# Altium PCB DC_DC_PCB.PcbDoc
Units mm, origin at the board's own origin, x right, y up, seen from the top; angles counter-clockwise.
Board outline 59.94 x 78.23 mm, 2 copper layers (Top Layer, Bottom Layer); 46 components, 38 nets, 161 pads, 38 vias.
Unrouted connection lines stored in the file: 15.
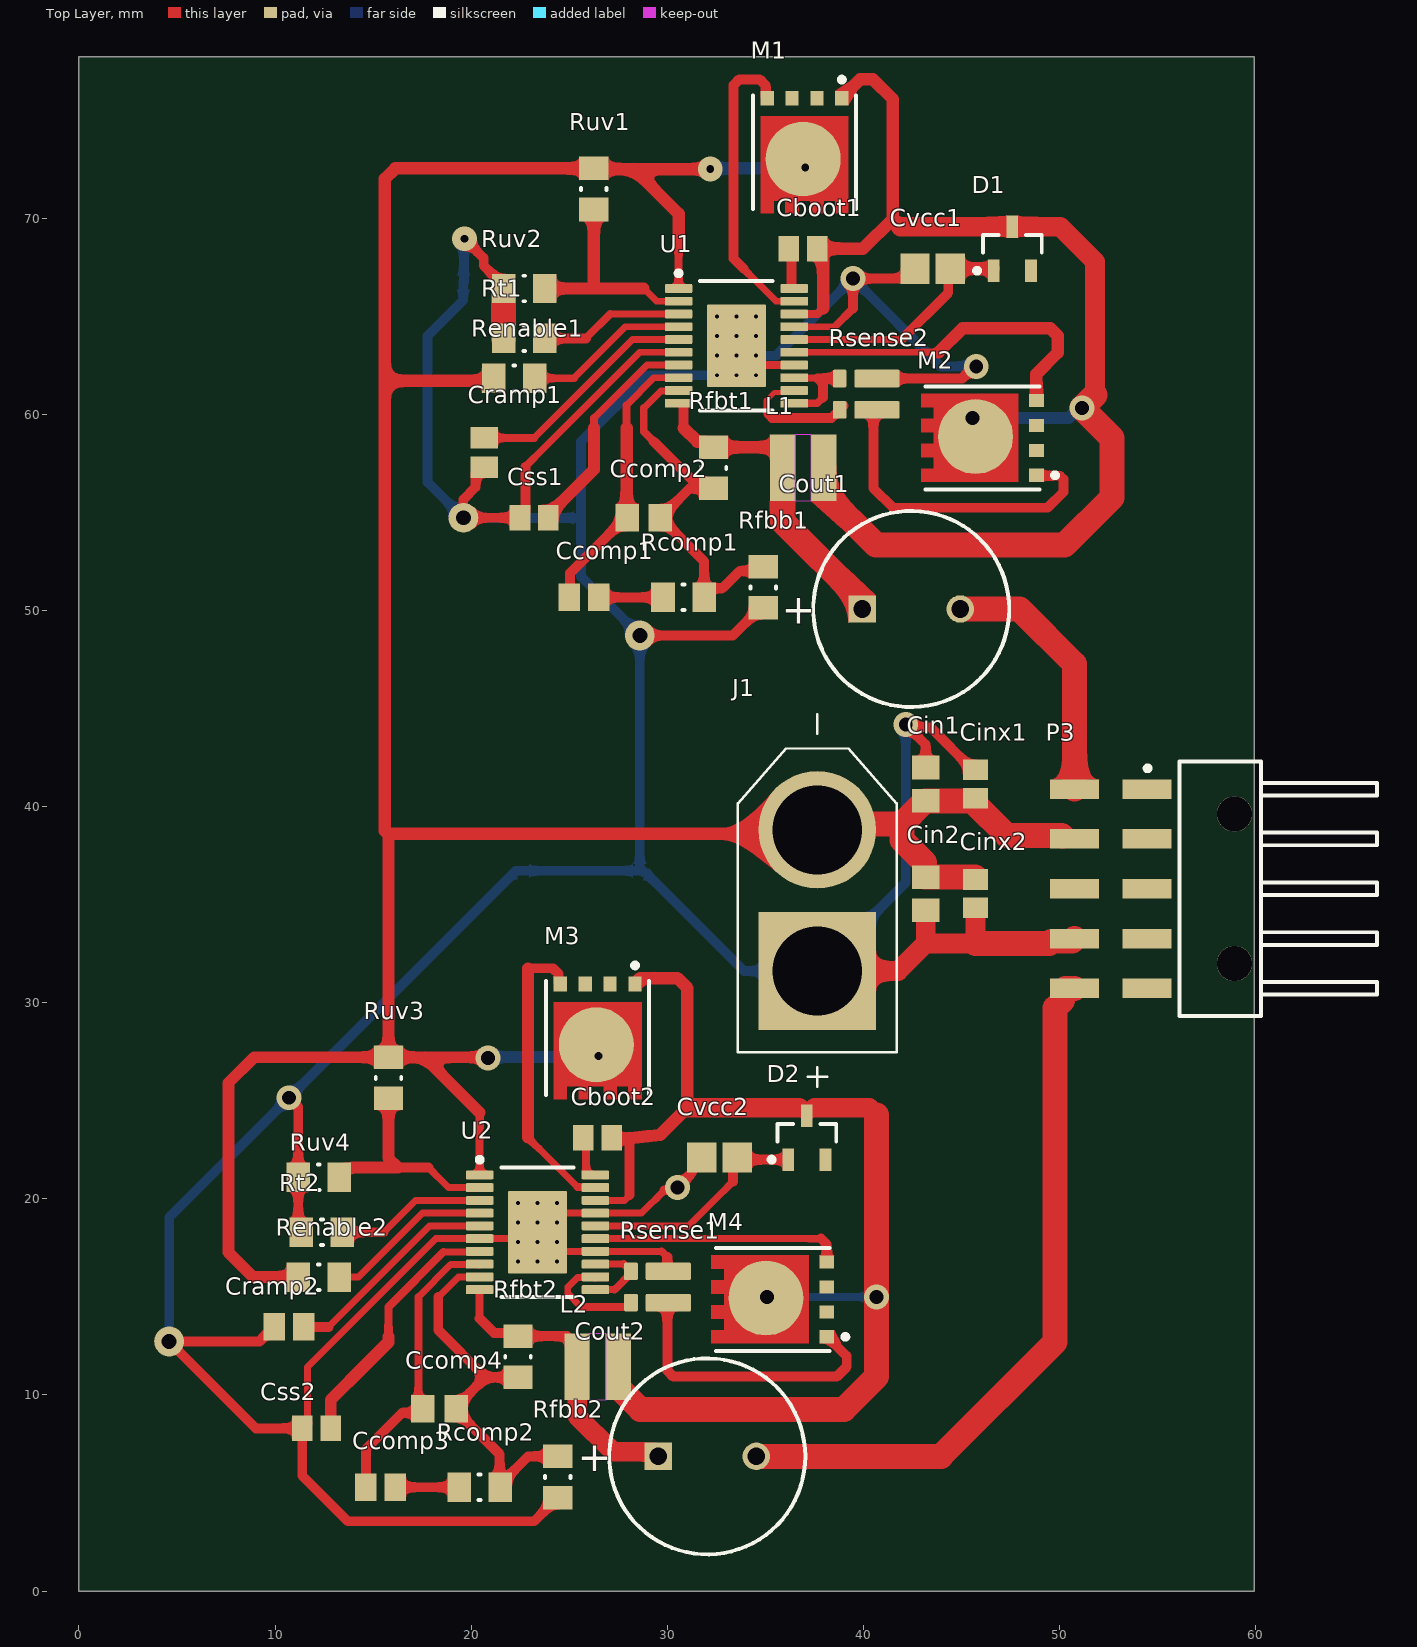
[diagram p0: Top Layer view]
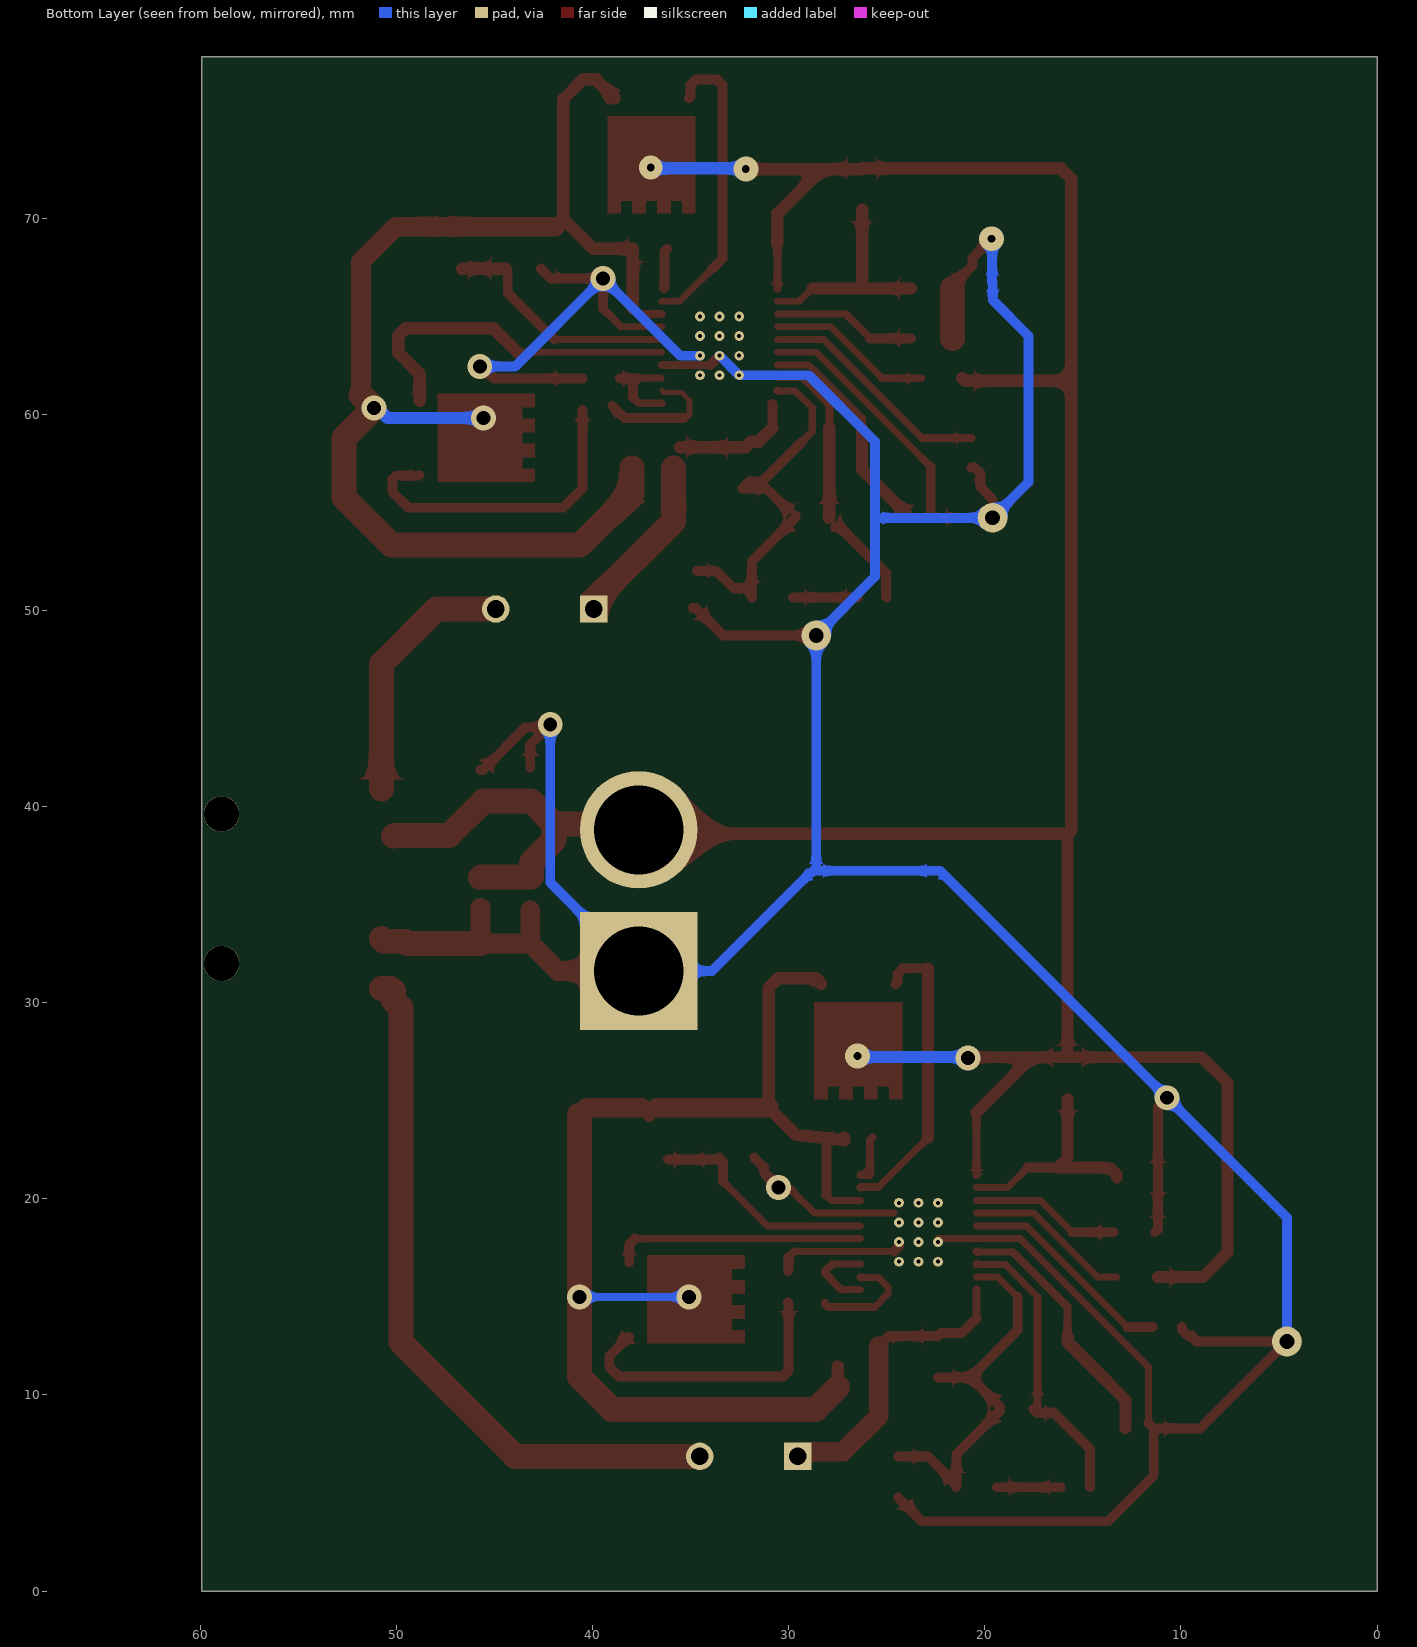
[diagram p1: Bottom Layer view, seen from below]
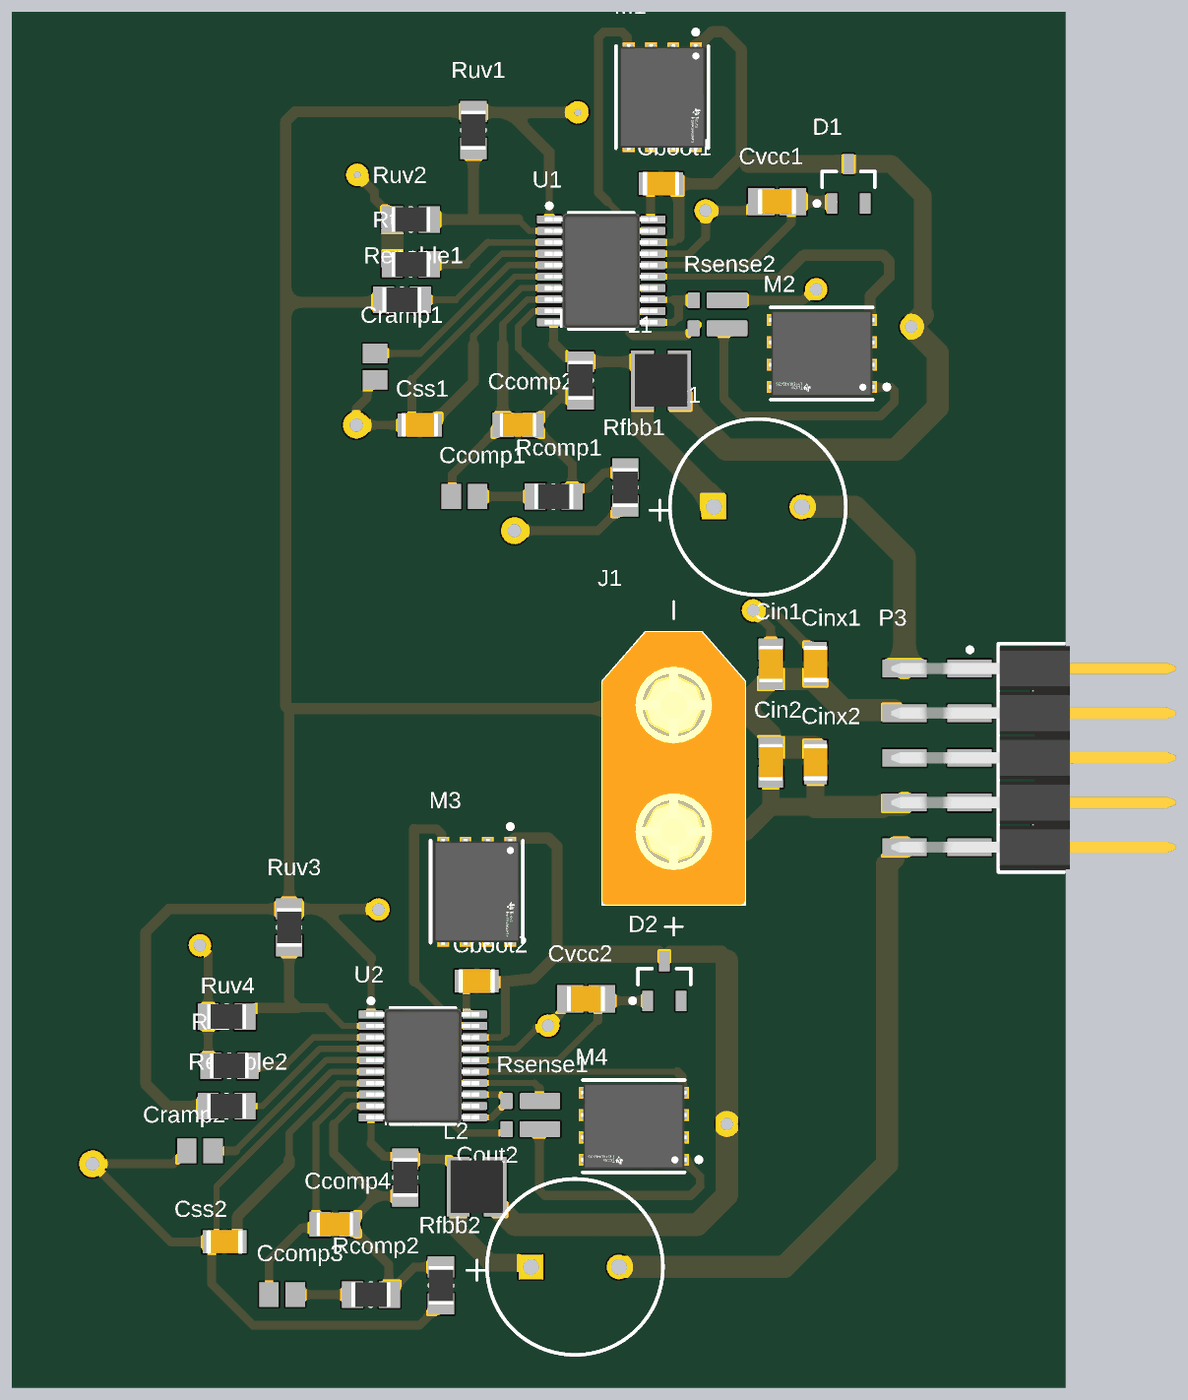
[diagram p2: 3D render of the assembled board from above, using the file's embedded part models]

## Layer stack, top to bottom
Top Solder: solder mask 0.0102, Solder Resist, Dk 3.5
Top Layer: signal copper 0.0356
Dielectric 1: dielectric 0.32, FR-4, Dk 4.8
Bottom Layer: signal copper 0.0356
Bottom Solder: solder mask 0.0102, Solder Resist, Dk 3.5

## Board outline
0,0 59.944,0 59.944,78.232 0,78.232

## Design rules (kind name [scope] priority, off if disabled: settings)
AssemblyTestPointUsage [All] p1: isadvanced=TRUE
AssemblyTestpoint [All] p1: isadvanced=TRUE testpointundercomponent=TRUE minsize=1.016 maxsize=2.54 preferedsize=1.524 minholesize=0 maxholesize=1.016 preferedholesize=0.813 testpointgrid=0.025 usegrid=TRUE gridtolerance=0 allowsidetop=TRUE allowsidebottom=TRUE
Clearance Clearance_1 [OnMid vs OnMid] p1: gap=0.2 ignorepadtopadclearanceinfootprint=FALSE sourcerule=40 cellrowname=All cellrowtype=0 cellcolname=All cellcoltype=0 innerlayers=TRUE
Clearance Clearance_2 [(ExistsOnLayer('Top Layer') Or ExistsOnLayer('Bottom Layer')) vs (ExistsOnLayer('Top Layer') Or ExistsOnLayer('Bottom Layer'))] p2: gap=0.2 ignorepadtopadclearanceinfootprint=FALSE sourcerule=40 cellrowname=All cellrowtype=0 cellcolname=All cellcoltype=0 outerlayers=TRUE
Clearance [All] p3: gap=0.25 ignorepadtopadclearanceinfootprint=FALSE ismatrix=TRUE
ComponentClearance [All] p1: isadvanced=TRUE gap=0.2 collisioncheckmode=3 verticalgap=0.2 showdistances=FALSE
FabricationTestPointUsage [All] p1: isadvanced=TRUE valid=0 allowmultiple=FALSE
FabricationTestpoint [All] p1: isadvanced=TRUE side=3 testpointundercomponent=TRUE minsize=1.016 maxsize=2.54 preferedsize=1.524 minholesize=0 maxholesize=1.016 preferedholesize=0.813 testpointgrid=0.025 allowsidetop=TRUE allowsidebottom=TRUE usegrid=TRUE gridtolerance=0
FanoutControl Fanout_BGA [IsBGA] p1: isadvanced=TRUE bgadir=Out bgaviamode=Centered fanoutstyle=Auto fanoutdirection=Alternating viagrid=0.025 // Fanout_BGA (Default Rule)
FanoutControl Fanout_LCC [IsLCC] p2: isadvanced=TRUE bgadir=Out bgaviamode=Centered fanoutstyle=Auto fanoutdirection=Alternating viagrid=0.025 // Fanout_LCC (Default Rule)
FanoutControl Fanout_SOIC [IsSOIC] p3: isadvanced=TRUE bgadir=Out bgaviamode=Centered fanoutstyle=Auto fanoutdirection=Alternating viagrid=0.025 // Fanout_SOIC (Default Rule)
FanoutControl Fanout_Small [(CompPinCount < 5)] p4: isadvanced=TRUE bgadir=Out bgaviamode=Centered fanoutstyle=Auto fanoutdirection=OutThenIn viagrid=0.025 // Fanout_Small (Default Rule)
FanoutControl Fanout_Default [All] p5: isadvanced=TRUE bgadir=Out bgaviamode=Centered fanoutstyle=Auto fanoutdirection=Alternating viagrid=0.025 // Fanout_Default (Default Rule)
Height [All] p1: isadvanced=TRUE minheight=0 maxheight=25.4 prefheight=12.7
HoleSize [All] p1 off: isadvanced=TRUE absolutevalues=TRUE maxlimit=5 minlimit=0.4 maxpercent=80.000 minpercent=20.000
HoleToHoleClearance [All] p1: isadvanced=TRUE gap=0.2 allowstackedmicrovias=TRUE
LayerPairs [All] p1 off: isadvanced=TRUE enforce=TRUE
MinimumSolderMaskSliver [All] p1: isadvanced=TRUE minsoldermaskwidth=0.12
NetAntennae [All] p1 off: isadvanced=TRUE netantennaetolerance=0
PasteMaskExpansion [All] p1: isadvanced=TRUE expansion=0
PlaneClearance [All] p1: isadvanced=TRUE clearance=0.508
PlaneConnect [All] p1: isadvanced=TRUE planeconnectstyle=Direct reliefexpansion=0.508 reliefentries=4 reliefconductorwidth=0.254 reliefairgap=0.254
PolygonConnect [All] p1: connectstyle=Relief reliefconductorwidth=0.254 reliefentries=4 polygonreliefangle="90 Angle" airgapwidth=0.254
RoutingCorners [All] p1: isadvanced=TRUE cornerstyle=45-Degree minsetback=2.54 maxsetback=2.54
RoutingPriority [All] p1: isadvanced=TRUE routingpriority=0
RoutingVias [All] p1: holewidth=0.711 width=1.27 viastyle="Through Hole" minholewidth=0.711 minwidth=1.27 maxholewidth=0.711 maxwidth=1.27
ShortCircuit [All] p1: isadvanced=TRUE allowed=FALSE
SilkToSilkClearance [All] p1 off: isadvanced=TRUE silktosilkclearance=0.254
SilkToSolderMaskClearance [IsPad] p1 off: isadvanced=TRUE minsilkscreentomaskgap=0.254 clearancetoexposedcopper=TRUE
SolderMaskExpansion [All] p1: isadvanced=TRUE expansion=0.102 istentingtop=FALSE soldermaskfromhole=TRUE
SupplyNets "Schematic Supply Nets_1" [InNet('VIN')] p1: isadvanced=TRUE voltage=0.000
SupplyNets "Schematic Supply Nets" [InNet('GND')] p2: isadvanced=TRUE voltage=0.000
UnRoutedNet [All] p1: isadvanced=TRUE
UnpouredPolygon [All] p1: isadvanced=TRUE
Width Power [All] p1: isadvanced=TRUE maxlimit=2 minlimit=0.25 preferedwidth=1 minimp=50.000000 maximp=50.000000 favimp=50.000000
Width MaxMinWidth_1 [InNet('VIN')] p2: maxlimit=2 minlimit=0.25 preferedwidth=1.5 minimp=50.000000 maximp=50.000000 favimp=50.000000
Width Signal [All] p3: maxlimit=1 minlimit=0.2 preferedwidth=0.5 minimp=50.000000 maximp=50.000000 favimp=50.000000
4 further rules are at their usual default settings.

## Classes and differential pairs
component class Topcheat: J1 P3
component class 5V: Cboot1 Ccomp1 Ccomp2 Cin1 Cinx1 Cout1 Cramp1 Css1 Cvcc1 D1 L1 M1 M2 Rcomp1 Renable1 Rfbb1 Rfbt1 Rsense2 Rt1 Ruv1 Ruv2 U1
component class 3.3V: Cboot2 Ccomp3 Ccomp4 Cin2 Cinx2 Cout2 Cramp2 Css2 Cvcc2 D2 L2 M3 M4 Rcomp2 Renable2 Rfbb2 Rfbt2 Rsense1 Rt2 Ruv3 Ruv4 U2

## Components (designator, comment, footprint, x,y, rotation, side; value= is the part's Value field where it differs from the comment)
Cboot1 "Capacitor 100 nF +/-10% 50 V 0805" CAPC2013X95X50LL10T25 36.93,68.456 r180 top value=100nF
Cboot2 "Capacitor 100 nF +/-10% 50 V 0805" CAPC2013X95X50LL10T25 26.452,23.124 r180 top value=100nF
Ccomp1 "Cap Pol3" C0805 25.754,50.676 r0 top value=100pF
Ccomp2 "Capacitor 10 uF +/- 10% 16 V 0805" CAPC2013X135X45NL10T25 28.802,54.74 r0 top value=10pF
Ccomp3 "Cap Pol3" C0805 15.384,5.296 r0 top value=120pF
Ccomp4 "Capacitor 10 uF +/- 10% 16 V 0805" CAPC2013X135X45NL10T25 18.384,9.296 r0 top value=120pF
Cin1 "Capacitor 1 uF +/- 10% 50 V 0805" CAPC2013X135X45NL10T25 43.18,41.148 r270 top value=2.2µF
Cin2 "Capacitor 1 uF +/- 10% 50 V 0805" CAPC2013X135X45NL10T25 43.18,35.56 r90 top value=2.2µF
Cinx1 "Capacitor 100 nF +/-10% 50 V 0805" CAPC2013X95X50LL10T25 45.72,41.148 r270 top value=100nF
Cinx2 "Capacitor 100 nF +/-10% 50 V 0805" CAPC2013X95X50LL10T25 45.72,35.56 r90 top value=100nF
Cout1 "ECA-1HM221" CAPPR65-500-1250X1000X1350 42.441,50.08 r0 top value=220µF
Cout2 "ECA-1HM221" CAPPR65-500-1250X1000X1350 32.04,6.868 r0 top value=47µF
Cramp1 "Cap Pol3" C0805 20.674,58.054 r90 top value=100pF
Cramp2 "Cap Pol3" C0805 10.704,13.472 r0 top value=120pF
Css1 "Capacitor 100 nF +/-10% 50 V 0805" CAPC2013X95X50LL10T25 23.214,54.74 r0 top value=47nF
Css2 "Capacitor 100 nF +/-10% 50 V 0805" CAPC2013X95X50LL10T25 12.109,8.296 r0 top value=33nF
Cvcc1 "Capacitor 1 uF +/- 10% 25 V 0805" CAPC2013X145X50ML20T25 43.534,67.44 r180 top value=1µF
Cvcc2 "Capacitor 1 uF +/- 10% 25 V 0805" CAPC2013X145X50ML20T25 32.664,22.108 r180 top value=1µF
D1 "Diode BAS16" SOT-23_N 47.598,68.456 r90 top
D2 "Diode BAS16" SOT-23_N 37.12,23.124 r90 top
J1 "XT60-M" AMASS_XT60-M 37.654,35.216 r90 top
L1 "74438333022" WE-MAPI_3010 36.93,57.28 r180 top
L2 "74438333022" WE-MAPI_3010 26.452,11.44 r180 top
M1 "CSD18514Q5A" FP-DQJ0008A-MFG 37,73.378 r270 top
M2 "CSD18514Q5A" FP-DQJ0008A-MFG 46.074,58.804 r180 top
M3 "CSD18514Q5A" FP-DQJ0008A-MFG 26.452,28.204 r270 top
M4 "CSD18514Q5A" FP-DQJ0008A-MFG 35.384,14.869 r180 top
P3 "610110249121" 610110249121 58.198,35.814 r90 top
Rcomp1 "Resistor 0R +/- 1% 0805 125 mW" RESC2013X50X35ML15T15 30.834,50.676 r180 top value=187k
Rcomp2 "Resistor 0R +/- 1% 0805 125 mW" RESC2013X50X35ML15T15 20.434,5.296 r180 top value=158k
Renable1 "Resistor 0R +/- 1% 0805 125 mW" RESC2013X50X35ML15T15 22.198,61.852 r180 top value=1M
Renable2 "Resistor 0R +/- 1% 0805 125 mW" RESC2013X50X35ML15T15 12.228,16.012 r180 top value=1M
Rfbb1 "Resistor 10k +/-1% 0805 125 mW" RESC2013X50X35ML15T15 34.898,51.184 r90 top value=10k
Rfbb2 "Resistor 10k +/-1% 0805 125 mW" RESC2013X50X35ML15T15 24.42,5.818 r90 top value=10.9k
Rfbt1 "Resistor 0R +/- 1% 0805 125 mW" RESC2013X50X35ML15T15 32.358,57.28 r90 top value=33k
Rfbt2 "Resistor 0R +/- 1% 0805 125 mW" RESC2013X50X35ML15T15 22.388,11.948 r90 top value=18.7k
Rsense1 "Resistor 7mR +/-1% 1206 63 mW" SUSUMU-3216T4A 29.5,15.504 r90 top value=20m
Rsense2 "Resistor 7mR +/-1% 1206 63 mW" SUSUMU-3216T4A 40.141,61.034 r90 top value=7m
Rt1 "Resistor 0R +/- 1% 0805 125 mW" RESC2013X50X35ML15T15 22.706,63.884 r0 top value=5.6k
Rt2 "Resistor 0R +/- 1% 0805 125 mW" RESC2013X50X35ML15T15 12.384,18.296 r0 top value=5.23k
Ruv1 "Resistor 0R +/- 1% 0805 125 mW" RESC2013X50X35ML15T15 26.262,71.504 r90 top value=15k
Ruv2 "Resistor 0R +/- 1% 0805 125 mW" RESC2013X50X35ML15T15 22.706,66.424 r0 top value=2.8k
Ruv3 "Resistor 0R +/- 1% 0805 125 mW" RESC2013X50X35ML15T15 15.784,26.172 r90 top value=13.7k
Ruv4 "Resistor 0R +/- 1% 0805 125 mW" RESC2013X50X35ML15T15 12.228,21.092 r0 top value=2.55k
U1 "LM25116MH" PWP0020A_N 33.528,63.5 r0 top
U2 "LM25116MH" PWP0020A_N 23.384,18.296 r0 top

## Footprints (in the part's own frame and the unit in brackets; to place one, negate y for a bottom-side part, rotate by r counter-clockwise, add the part's x,y. Pads: shape width x height; smd on the part's side, far side on the other; paste and mask are expansions set on the pad)
610110249121 [mm] "Pin Header, pitch 2.54 mm, SMD, Angled, dual row, 10p"
  rect 1x2.5 smd: 1(5.08,3.72) 2(5.08,7.42) 3(2.54,3.72) 4(2.54,7.42) 5(0,3.72) 6(0,7.42) 7(-2.54,3.72) 8(-2.54,7.42) 9(-5.08,3.72) 10(-5.08,7.42)
  round 1.8 hole 1.8 unplated: MH1(3.81,-0.73) MH2(-3.81,-0.73)
  silkscreen extent -6.5,-8 6.5,3.82, body extent -6.35,-8 6.35,8.16, height 5.1
AMASS_XT60-M [mm]
  round 6 hole 4.55: N(3.6,0)
  rect 6x6 / inner round 6 / far side rect 6x6 hole 4.55: P(-3.6,0)
  silkscreen extent -9.5,-4.05 9.5,4.05, body extent -7.75,-4.05 7.75,4.05, height 16
C0805 [mm] "Chip Capacitor, Body 2.0x1.3mm, IPC High Density"
  rect 1.1x1.4 smd: 1(-0.75,0) 2(0.75,0)
  body extent -1.1,-0.72 1.1,0.72, height 1.4
CAPC2013X95X50LL10T25 [mm] "Chip Capacitor, 2-Leads, Body 2.10x1.35mm, IPC High Density"
  rect 1.05x1.3 smd: 1(-0.725,0) 2(0.725,0)
  body extent -1.05,-0.67 1.05,0.67, height 0.95
CAPC2013X135X45NL10T25 [mm] "Chip Capacitor, 2-Leads, Body 2.10x1.35mm, IPC Medium Density"
  rect 1.2x1.4 smd: 1(-0.85,0) 2(0.85,0)
  body extent -1.05,-0.67 1.05,0.67, height 1.35
CAPC2013X145X50ML20T25 [mm] "Chip Capacitor, 2-Leads, Body 2.2x1.45mm, IPC Low Density"
  rect 1.5x1.55 smd: 1(-0.9,0) 2(0.9,0)
  body extent -1.1,-0.72 1.1,0.73, height 1.45
CAPPR65-500-1250X1000X1350 [mm] "THD, 2-Leads, Dia 10mm, Body Length 12.5mm"
  rect 1.4x1.4 hole 0.9: 1(-2.5,0)
  round 1.4 hole 0.9: 2(2.5,0)
  silkscreen extent -5,-5 5,5, body extent -5,-5 4.95,5, height 13.5
FP-DQJ0008A-MFG [mm]
  rect 0.75x0.675 smd paste-1000 mask+0: 1(-2.752,1.905) 2(-2.752,0.635) 3(-2.752,-0.635) 4(-2.752,-1.905)
  round 3.821 smd paste-1000 mask+0: 5-6-7-8(0.35,-0.07)
  Top Layer region: 3.127,-2.242 3.127,-1.568 2.472,-1.568 2.472,-0.972 3.127,-0.972 3.127,-0.297 2.472,-0.297 2.472,0.298 3.127,0.298 3.127,0.973 2.472,0.973 2.472,1.568 3.127,1.568 3.127,2.243 -1.823,2.242 -1.823,-2.242
  silkscreen extent -3.82,-2.63 2.9,2.63, body extent -3.23,-2.6 3.23,2.6, height 0.25
PWP0020A_N [mm] "SOP, 20-Leads, Body 6.6x4.5mm, Pitch 0.65mm, Thermal Pad 4.2x3mm, IPC Medium Density"
  rrect22% 1.4x0.45 smd: 1(-2.95,2.925) 2(-2.95,2.275) 3(-2.95,1.625) 4(-2.95,0.975) 5(-2.95,0.325) 6(-2.95,-0.325) 7(-2.95,-0.975) 8(-2.95,-1.625) 9(-2.95,-2.275) 10(-2.95,-2.925) 11(2.95,-2.925) 12(2.95,-2.275) 13(2.95,-1.625) 14(2.95,-0.975) 15(2.95,-0.325) 16(2.95,0.325) 17(2.95,0.975) 18(2.95,1.625) 19(2.95,2.275) 20(2.95,2.925)
  rrect3% 3x4.2 smd: 21(0,0)
  silkscreen extent -3.07,-3.3 1.85,3.82, body extent -3.21,-3.25 3.21,3.25, height 1
RESC2013X50X35ML15T15 [mm] "Chip Resistor, 2-Leads, Body 2.2x1.4mm, IPC Low Density"
  rect 1.2x1.5 smd: 1(-1.05,0) 2(1.05,0)
  silkscreen extent -0.05,-0.65 0.05,0.65, body extent -1.1,-0.7 1.1,0.7, height 0.5
SOT-23_N [mm] "SOT23, 3-Leads, Body 2.9x1.3mm, Pitch 0.95mm, Lead Span 2.5mm, IPC Medium Density"
  rect 1.15x0.6 smd: 1(-1.125,0.95) 2(-1.125,-0.95) 3(1.125,0)
  silkscreen extent -1.25,-1.5 0.7,1.92, body extent -0.7,-1.5 0.7,1.5, height 1.1
SUSUMU-3216T4A [mm] "SMD, 4-Leads, Body 3.2x1.6mm"
  rrect15% 0.9x2.3 smd: 1(-0.8,-0.55) 2(0.8,-0.55)
  rrect20% 0.9x0.7 smd: 3(-0.8,1.35) 4(0.8,1.35)
  body extent -0.8,-1.6 0.8,1.6, height 0.55
WE-MAPI_3010 [mm] "SMT Shielded Power Inductor, body 3.00 x 3.00 mm"
  rect 1.3x3.4 smd: 1(-1.05,0) 2(1.05,0)
  Top Layer keep-out region: -0.4,1.7 0.4,1.7 0.4,-1.7 -0.4,-1.7
  body extent -1.5,-1.5 1.5,1.5, height 1.01

## Part data
Cboot1 Cboot2 Cinx1 Cinx2 Css1 Css2: library part CMP-001-00018-6, "Chip Capacitor, 100 nF, +/- 10%, 50 V, 0805 (2012 Metric)", Capacitor Type=Ceramic, Case/Package=0805, Max Operating Temperature=125°C, Min Operating Temperature=-55°C, Tolerance=10%, Voltage Rating=50V, Mounting Technology=SM, Pins=2, RoHS Compliant=True
Ccomp1 Ccomp3 Cramp1 Cramp2: library part CMP-001-00095-1, "Polarized Capacitor (Surface Mount)", Case/Package="Chip Capacitor", Component Type=Standard, Design Item ID="Cap Pol3", LatestRevisionDate=29-May-2009, LatestRevisionNote="IPC-7351 Footprint Added.", PackageReference=C0805, Pins=2, Published=8-Jun-2000, Publisher="Altium Limited", Source="Miscellaneous Devices.SchLib"
Ccomp2 Ccomp4: library part CMP-001-00015-6, "Chip Capacitor, 10 uF, +/- 10%, 16 V, 0805 (2012 Metric)", Capacitor Type=Ceramic, Case/Package=0805, Max Operating Temperature=85°C, Min Operating Temperature=-55°C, Tolerance=10%, Voltage Rating=16V, Mounting Technology=SM, Pins=2, RoHS Compliant=True
Cin1 Cin2: library part CMP-001-00007-6, "Chip Capacitor, 1 uF, +/- 10%, 50 V, 0805 (2012 Metric)", Capacitor Type=Ceramic, Case/Package=0805, Max Operating Temperature=125°C, Min Operating Temperature=-55°C, Tolerance=10%, Voltage Rating=50V, Mounting Technology=SM, Pins=2, RoHS Compliant=True
Cout1 Cout2: library part CMP-001-00028-7, "Aluminum Electrolytic Capacitor, 220 uF, +/- 20%, 50 V, -40 to 85 degC, 2-Pin THD, RoHS, Bulk", Capacitor Type=Electrolytic, Case/Package=Radial, Manufacturer=Panasonic, Max Operating Temperature=85°C, Min Operating Temperature=-40°C, Package Description="2-Pin Radial Lead, Dia 10 mm, Body Length 12.5 mm", Package Quantity=200, Package Reference=CAPPR65-500-1250X1000X1350, Ripple Current=400mA, Tolerance=20%, Voltage Rating=50V, Datasheet URL=http://industrial.panasonic.com/cdbs/www-data/pdf/RDF0000/DMF0000COL68.pdf, Datasheet Version=Mar-16, Diameter=10mm, Lead Pitch=5mm, Manufacturer URL=http://www.panasonic.com/, Mounting Technology=TH, Packaging=Bulk, Pins=2, Ripple Current (AC)=400mA, RoHS Compliant=True
Cvcc1 Cvcc2: library part CMP-001-00010-6, "Chip Capacitor, 1 uF, +/-10%, 25 V, 0805 (2012 Metric)", Capacitor Type=Ceramic, Case/Package=0805, Max Operating Temperature=125°C, Min Operating Temperature=-55°C, Tolerance=10%, Voltage Rating=25V, Mounting Technology=SM, Pins=2, RoHS Compliant=True
D1 D2: library part CMP-004-00112-1, "Silicon Switching Diode for High-Speed Switching", Case/Package="3-Pin SOT-23 Package 0.95 mm Pitch, 2.5 mm Lead Span", Component Type=Standard, ComponentLink1Description="Manufacturer Link", ComponentLink1URL=http://www.infineon.com/, ComponentLink2Description=Datasheet, ComponentLink2URL=http://www.infineon.com/upload/Document/cmc_upload/documents/012/5331/bas16series.pdf, DatasheetVersion=Oct-1999, Design Item ID="Diode BAS16", LatestRevisionDate=29-May-2009, LatestRevisionNote="IPC-7351 Footprint Added.", Note="Pin 2 is not connected and not drawn.", PackageReference=SOT-23, PackageVersion=Sep-2001, Pins=2, Published=21-Mar-2003, Publisher="Altium Limited", Source="Miscellaneous Devices.SchLib"
J1: library part CMP-047-000000-1, "Plug; DC supply; XT60; male; PIN: 2; for cable; soldered; 30A; 500V", Package=Package, Check_prices=https://www.snapeda.com/parts/XT60-M/AMASS/view-part/?ref=eda, Component Type=Standard, Design Item ID=XT60-M, MF=AMASS, MP=XT60-M, Pin Count=2, SnapEDA_Link=https://www.snapeda.com/parts/XT60-M/AMASS/view-part/?ref=snap, Source=XT60-M.SchLib
L1: library part CMP-006-00070-1, "WE-MAPI SMT Power Inductor, size 3010, 2.2µH, 2.35A, 50MHz", Case/Package=3010, DC Resistance=150mO, Inductance=2.2µH, Manufacturer="Wurth Elektronik", Max Operating Temperature=125°C, Min Operating Temperature=-40°C, Operating Voltage (DC)=80V, Performance Rated Current=2.35A, Saturation Current @ 30%=4.85A, Self Resonant Frequency=50MHz, Category="Power Inductors", Component Type=Standard, ComponentLink1Description="Website Link", ComponentLink1URL=https://www.we-online.com/redexpert/article/74438333022?ad, ComponentLink2Description="Datasheet Link", ComponentLink2URL=https://www.we-online.com/redexpert/spec/74438333022?ad, Design Item ID=74438333022, Height=1mm, Length=3mm, Manufacturer Part Number=74438333022, Match Code=WE-MAPI, Mount="Surface Mount", Packaging="Tape and Reel", Pins=2, Source=WE-MAPI.SchLib, Width=3mm
L2: library part CMP-006-00070-1, "WE-MAPI SMT Power Inductor, size 3010, 2.2µH, 2.35A, 50MHz", Case/Package=3010, DC Resistance=150mO, Inductance=3.8µH, Manufacturer="Wurth Elektronik", Max Operating Temperature=125°C, Min Operating Temperature=-40°C, Operating Voltage (DC)=80V, Performance Rated Current=2.35A, Saturation Current @ 30%=4.85A, Self Resonant Frequency=50MHz, Category="Power Inductors", Component Type=Standard, ComponentLink1Description="Website Link", ComponentLink1URL=https://www.we-online.com/redexpert/article/74438333022?ad, ComponentLink2Description="Datasheet Link", ComponentLink2URL=https://www.we-online.com/redexpert/spec/74438333022?ad, Design Item ID=74438333022, Height=1mm, Length=3mm, Manufacturer Part Number=74438333022, Match Code=WE-MAPI, Mount="Surface Mount", Packaging="Tape and Reel", Pins=2, Source=WE-MAPI.SchLib, Width=3mm
M1 M2 M3 M4: library part CMP-011-00052-1, "40-V, N channel NexFET™ power MOSFET, single SON 5 mm x 6 mm, 4.9 mOhm 8-VSONP -55 to 150", Max Operating Temperature=150°C, Min Operating Temperature=-55°C, Pins=8
P3: library part CMP-002-00609-1, "Board Connector, 10 Contact(s), 2 Row(s), Male, Right Angle, Surface Mount Terminal", Max Operating Temperature=105°C, Min Operating Temperature=-40°C, Connector Type="Male Pin", Gender=Male, Mounting Technology="Surface Mount", Pins=10
Rcomp1 Rcomp2 Renable1 Renable2 Rfbt1 Rfbt2 Rt1 Rt2 Ruv1 Ruv2 Ruv3 Ruv4: library part CMP-009-00001-5, "Chip Resistor, 0 Ohm, +/- 1%, 125 mW, -55 to 155 degC, 0805 (2012 Metric)", Case/Package=0805, Max Operating Temperature=155°C, Min Operating Temperature=-55°C, Power=125mW, Tolerance=1%, Voltage Rating=150V, Mounting Technology=SM, Pins=2, RoHS Compliant=True
Rfbb1 Rfbb2: library part CMP-009-00018-5, "Chip Resistor, 10 KOhm, +/- 1%, 125 mW, -55 to 155 degC, 0805 (2012 Metric)", Case/Package=0805, Max Operating Temperature=155°C, Min Operating Temperature=-55°C, Power=125mW, Tolerance=1%, Voltage Rating=150V, Mounting Technology=SM, Pins=2, RoHS Compliant=True
Rsense1 Rsense2: library part CMP-009-00119-3, "Chip Resistor, 0,007 Ohms, +/-1%, 63 mW, -55 to 155 degC, 1206", Case/Package=1206, Max Operating Temperature=155°C, Min Operating Temperature=-55°C, Tolerance=1%, Pins=4
U1 U2: library part CMP-00024-00007-1, "6-42V Wide Vin, Current Mode Synchronous Buck Controller 20-HTSSOP -40 to 125", Case/Package="HTSSOP EP", Max Operating Temperature=125°C, Min Operating Temperature=-40°C, Mounting Technology="Surface Mount", Pins=20

## Free pads (board coordinates)
  round 1.524 hole 0.762: 2(28.6,48.728) 3(19.606,54.734) 4(4.6,12.728)

## Via types
v1: diameter 0.5, hole 0.2, Top Layer to Bottom Layer, 24 vias
v2: diameter 1.27, hole 0.711, Top Layer to Bottom Layer, 10 vias
v3: diameter 1.27, hole 0.4, Top Layer to Bottom Layer, 3 vias
v4: diameter 1.2, hole 0.4, Top Layer to Bottom Layer, 1 vias

## Nets (pads, with @x,y where several pads share a name; then routed paths per layer and width w, separated by ;. In a path a pad name is that pad's centre, name@x,y a point inside that pad or via, vN(x,y) a via of type N, cw(c..) or ccw(c..) an arc to the next point about the centre after c; other vN are vias at no path point)
3.3: Cout2.2 P3.10 | length 36.4
  Top Layer w1.27: Cout2.2 43.952,6.868 49.784,12.7 49.784,29.74 50.163,30.119 50.163,30.599 50.298,30.734 P3.10
5: Cout1.2 P3.2 | length 13.4
  Top Layer w1.27: Cout1.2 47.964,50.08 50.778,47.266 P3.2
GND: Cin1.1 Cin2.1 Cinx1.1 Cinx2.1 Cramp1.1 Cramp2.1 Css1.1 Css2.1 Cvcc1.2 Cvcc2.2 J1.P P3.8 pad.2 pad.3 pad.4 Rfbb1.1 Rfbb2.1 Rsense1.2 Rsense2.2 Rt1.1 Rt2.1 Ruv2.1 Ruv4.1 U1.6 U1.14 U1.17 U1.21 U2.6 U2.14 U2.17 U2.21 | length 275.5
  Top Layer w0.35: Css2.1@11.659,8.571 11.659,11.432 18.198,17.971 U2.6 U2.21@22.384,17.971 ; 22.764,57.338 28.602,63.175 U1.6 ; U2.21@24.634,17.321 U2.14 29.715,17.321 ; U2.21@24.634,19.271 U2.17 28.695,19.271 29.861,20.437 ; U1.17 38.538,64.475
  Top Layer w0.4: 29.715,17.321 30.008,17.028 ; U1.21@34.003,62.525 U1.14 ; 38.538,64.475 39.47,65.408
  Top Layer w0.5: Cramp2.1 9.954,13.322 9.654,13.022 9.504,13.022 9.21,12.728 pad.4 9.032,8.296 Css2.1 ; v2(10.704,25.156) 11.178,24.682 Ruv4.1 11.178,18.452 Rt2.1 ; Css2.1@11.659,8.571 Css2.1 ; v3(19.658,68.964) 20.637,67.984 20.637,67.592 Ruv2.1@21.656,66.574 ; Cramp1.1 20.524,57.304 20.224,57.004 20.224,56.292 19.6,55.668 19.6,54.728 pad.3 22.483,54.734 Css1.1 22.764,55.015 22.764,57.338 ; v1(24.384,17.796) 24.384,17.571 U2.21@24.634,17.321 ; Rfbb2.1 23.208,3.556 13.716,3.556 11.384,5.888 Css2.1 ; pad.2 33.343,48.728 34.748,50.134 Rfbb1.1 ; 29.861,20.437 30.369,20.437 31.194,21.262 31.194,21.29 31.264,21.36 31.264,21.608 Cvcc2.2 ; 30.008,17.028 30.008,16.346 Rsense1.2 ; v1(33.528,63) U1.21@34.003,62.525 ; 39.47,65.408 v2(39.47,66.932) 42.134,66.932 42.634,67.432 Cvcc1.2 ; Rsense2.2@40.515,61.834 45.04,61.834 45.66,62.453 v2(45.758,62.453) ; Cin1.1 43.18,43.18 v2(42.164,44.196) 42.311,44.049 43.419,44.049 45.595,41.873 Cinx1.1
  Top Layer w1: J1.P 41.776,31.616 43.18,33.02 ; Cin2.1 43.18,33.02 ; Cinx2.1 45.72,33.02 43.18,33.02
  Top Layer w1.27: Rt1.1 Ruv2.1 ; 45.72,33.02 49.481,33.02 49.6,33.139 50.643,33.139 P3.8
  Bottom Layer w0.5: pad.4 4.6,19.052 v2(10.704,25.156) 22.276,36.728 28.6,36.728 ; 19.6,66.728 19.6,65.828 17.78,64.008 17.78,56.548 19.6,54.728 25.256,54.728 ; 19.629,66.728 19.629,68.935 v3(19.658,68.964) ; v1(33.528,63) v1(32.528,62) 28.98,62 25.6,58.62 25.6,51.728 pad.2 28.6,36.863 28.831,36.632 28.9,36.632 33.916,31.616 J1.P 42.164,36.126 v2(42.164,44.196) ; v1(34.528,63) 35.539,63 v2(39.47,66.932) 43.948,62.453 v2(45.758,62.453)
  other v1: 22.384,16.796 23.384,16.796 24.384,16.796 22.384,17.796 23.384,17.796 22.384,18.796 23.384,18.796 24.384,18.796 22.384,19.796 23.384,19.796 24.384,19.796 33.528,62 34.528,62 32.528,63 32.528,64 33.528,64 34.528,64 32.528,65 33.528,65 34.528,65
  other v2: 30.516,20.584
NetCboot1_1: Cboot1.1 D1.3 L1.1 M1.1 M2.5-6-7-8 U1.18 | length 66.4
  Top Layer w0.4: U1.18 37.664,65.125 37.946,65.408
  Top Layer w0.635: 37.946,65.408 37.946,68.456 39.978,68.456 41.502,69.98 ; M1.1 38.905,76.168 39.829,77.092 40.486,77.092 41.502,76.076 41.502,69.98 ; 41.901,69.581 41.502,69.98
  Top Layer w1: 41.901,69.581 D1.3 50.029,69.581 51.816,67.794 51.816,60.989
  Top Layer w1.27: L1.1 37.995,57.265 37.995,55.985 40.64,53.34 50.263,53.34 52.678,55.756 52.678,58.804 v2(51.154,60.328) 51.816,60.989
  Bottom Layer w0.635: v2(45.566,59.82) 50.474,59.82 50.982,60.328 v2(51.154,60.328)
NetCboot1_2: Cboot1.2 U1.20 | length 2.1
  Top Layer w0.5: Cboot1.2 36.342,68.319 36.342,66.475 U1.20@36.367,66.45
NetCboot2_1: Cboot2.1 D2.3 L2.1 M3.1 M4.5-6-7-8 U2.18 | length 62.8
  Top Layer w0.35: U2.18 27.821,19.921 27.976,20.076
  Top Layer w0.4: M4.5-6-7-8 35.034,14.942 v2(35.088,14.996)
  Top Layer w0.508: 28.085,20.184 28.085,23.094
  Top Layer w0.635: Cboot2.1 27.177,22.999 27.19,23 28.085,23.094 28.992,23.19 29.633,23.257 31.024,24.648 31.024,30.744 30.516,31.252 28.615,31.252 28.357,30.994 M3.1 ; L2.1@27.502,10.39 L2.1 ; 36.721,24.648 D2.3 37.519,24.648 ; 40.304,24.648 40.676,24.276
  Top Layer w1: 31.024,24.648 36.721,24.648 ; 37.519,24.648 40.304,24.648
  Top Layer w1.27: L2.1@27.502,10.39 28.626,9.266 39.011,9.266 40.676,10.932 v2(40.676,14.996) 40.676,24.276
  Bottom Layer w0.4: v2(35.088,14.996) v2(40.676,14.996)
NetCboot2_2: Cboot2.2 U2.20 | length 2.4
  Top Layer w0.4: Cboot2.2 25.856,22.995 25.856,21.246 25.881,21.221 U2.20
NetCcomp1_1: Ccomp1.1 Ccomp2.1 U1.8 | length 13.8
  Top Layer w0.35: 27.926,60.468 29.334,61.875 U1.8
  Top Layer w0.4: 27.926,59.312 27.926,60.468
  Top Layer w0.508: Ccomp1.1 25.053,50.724 25.053,51.918 27.429,54.294 Ccomp2.1@27.606,54.294
  Top Layer w0.635: 27.926,59.312 27.926,54.766 Ccomp2.1
NetCcomp1_2: Ccomp1.2 Rcomp1.2 | length 3.3
  Top Layer w0.508: Ccomp1.2 Rcomp1.2
NetCcomp2_2: Ccomp2.2 Rcomp1.1 Rfbb1.2 Rfbt1.1 U1.9 | length 19.3
  Top Layer w0.35: 28.802,60.328 29.675,61.2 U1.9@30.553,61.2
  Top Layer w0.4: 28.802,60.328 28.802,59.128 29.31,58.62 ; U1.9@30.553,61.2 U1.9
  Top Layer w0.508: 29.31,58.62 31.354,56.576 32.012,56.576 Rfbt1.1 31.142,56.23 30.098,55.186 Ccomp2.2@29.998,55.186 ; Ccomp2.2@29.652,54.84 Ccomp2.2 31.884,52.508 Rcomp1.1@31.884,50.798 ; Rcomp1.1 Rcomp1.1@31.884,50.798 ; Rfbb1.2@34.683,52.019 33.701,52.019 32.827,51.144 32.23,51.144 Rcomp1.1@31.884,50.798
NetCcomp3_1: Ccomp3.1 Ccomp4.1 U2.8 | length 15.1
  Top Layer w0.35: 17.308,14.996 18.958,16.646 U2.8@20.409,16.646
  Top Layer w0.4: Ccomp4.1@17.308,9.408 17.308,14.996 ; U2.8@20.409,16.646 U2.8
  Top Layer w0.5: Ccomp3.1 14.634,7.242 16.477,9.085 17.323,9.085 Ccomp4.1
NetCcomp3_2: Ccomp3.2 Rcomp2.2 | length 3.2
  Top Layer w0.5: Ccomp3.2 Rcomp2.2
NetCcomp4_2: Ccomp4.2 Rcomp2.1 Rfbb2.2 Rfbt2.1 U2.9 | length 20
  Top Layer w0.35: 18.324,14.996 19.349,16.021 U2.9
  Top Layer w0.5: 18.324,14.996 18.324,13.31 20.736,10.898 ; Rcomp2.1 21.484,5.446 22.906,6.868 Rfbb2.2
  Top Layer w0.508: Ccomp4.2 19.234,9.196 21.454,6.976 Rcomp2.1@21.454,5.326 ; Ccomp4.2@19.234,9.396 20.736,10.898 Rfbt2.1
NetCout1_1: Cout1.1 L1.2 Rfbt1.2 U1.10 | length 15.2
  Top Layer w0.5: 30.834,59.312 U1.10@30.834,60.55
  Top Layer w0.635: 30.834,59.312 31.534,58.612 31.926,58.612 32.208,58.33 Rfbt1.2 L1.2@35.548,58.33
  Top Layer w1.27: L1.2 35.88,54.544 39.876,50.548 39.876,50.145 Cout1.1
NetCout2_1: Cout2.1 L2.2 Rfbt2.2 U2.10 | length 15.6
  Top Layer w0.4: 20.434,13.902 U2.10
  Top Layer w0.508: 20.434,13.902 21.174,13.162 22.224,13.162 Rfbt2.2 24.894,12.998 L2.2@25.402,12.49
  Top Layer w1: L2.2@25.402,12.49 L2.2 25.402,8.934 27.224,7.112 28.754,7.112 28.798,7.068 29.34,7.068 Cout2.1
NetCramp1_2: Cramp1.2 U1.5 | length 12
  Top Layer w0.35: 23.214,58.804 28.236,63.825 U1.5
  Top Layer w0.4: Cramp1.2 23.214,58.804
NetCramp2_2: Cramp2.2 U2.5 | length 11.1
  Top Layer w0.35: 12.736,13.472 17.885,18.621 U2.5
  Top Layer w0.5: Cramp2.2 12.736,13.472
NetCss1_2: Css1.2 U1.7 | length 11.5
  Top Layer w0.35: 26.262,59.82 28.968,62.525 U1.7
  Top Layer w0.4: 26.262,59.312 26.262,59.82
  Top Layer w0.508: Css1.2 Css1.2@23.939,54.865
  Top Layer w0.6: Css1.2@23.939,54.865 26.262,57.188 26.262,59.312
NetCss2_2: Css2.2 U2.7 | length 13.2
  Top Layer w0.35: 18.592,17.296 U2.7@20.409,17.296
  Top Layer w0.4: 15.784,12.964 15.784,14.488 18.592,17.296 ; U2.7@20.409,17.296 U2.7
  Top Layer w0.6: Css2.2 12.834,9.746 13.795,10.707
  Top Layer w0.635: 13.795,10.707 15.784,12.696 15.784,12.964
NetCvcc1_1: Cvcc1.1 D1.1 U1.16 | length 12.3
  Top Layer w0.35: U1.16 41.952,63.825
  Top Layer w0.5: 41.952,63.825 44.334,66.207 44.334,67.339 Cvcc1.1
  Top Layer w0.635: Cvcc1.1 46.631,67.44 D1.1@46.648,67.422
NetCvcc2_1: Cvcc2.1 D2.1 U2.16 | length 11.9
  Top Layer w0.35: U2.16 31.093,18.621 33.348,20.876
  Top Layer w0.5: 33.348,20.876 33.348,21.892 Cvcc2.1
  Top Layer w0.508: Cvcc2.1 33.673,21.999 D2.1
NetM1_4: M1.4 U1.19 | length 15.4
  Top Layer w0.35: 33.882,67.44 35.547,65.775 U1.19
  Top Layer w0.508: 33.882,67.44 33.374,67.948 33.374,76.794 33.672,77.092 34.714,77.092 35.012,76.794 35.012,76.214 M1.4
NetM2_1: M2.1 Rsense2.1 | length 16.5
  Top Layer w0.5: Rsense2.1@40.515,60.234 40.515,56.235 41.502,55.248 49.406,55.248 50.207,56.048 50.207,56.703 50.038,56.872 48.853,56.872 M2.1
NetM2_4: M2.4 U1.15 | length 17.9
  Top Layer w0.35: U1.15 43.842,63.175
  Top Layer w0.635: 43.842,63.175 45.058,64.392 49.539,64.392 49.911,64.02 49.911,63.149 48.827,62.064 M2.4
NetM3_4: M3.4 U2.19 | length 15.4
  Top Layer w0.35: 22.896,23.124 25.424,20.596
  Top Layer w0.4: 25.424,20.596 26.309,20.596 U2.19
  Top Layer w0.508: 22.896,31.76 24.166,31.76 24.464,31.462 24.464,31.04 M3.4
  Top Layer w0.6: 22.896,23.124 22.896,31.76
NetM4_1: M4.1 Rsense1.1 | length 14.9
  Top Layer w0.5: M4.1 38.174,12.964 39.152,11.985 39.152,11.44
  Top Layer w0.508: Rsense1.1 30.008,14.662 30.008,11.23 30.306,10.932 38.644,10.932 39.152,11.44
NetM4_4: M4.4 U2.15 | length 12.8
  Top Layer w0.35: U2.15 37.843,17.971
  Top Layer w0.5: 37.843,17.971 38.136,17.678 M4.4
NetRenable1_1: Renable1.1 U1.4 | length 8.4
  Top Layer w0.35: 25.246,61.852 27.87,64.475 U1.4
  Top Layer w0.4: Renable1.1 25.246,61.852
NetRenable2_1: Renable2.1 U2.4 | length 8.5
  Top Layer w0.35: Renable2.1 14.26,16.012 17.519,19.271 U2.4
NetRsense1_3: Rsense1.3 U2.12 | length 5.6
  Top Layer w0.35: 25.601,14.488 24.928,15.161 24.928,15.504 25.42,15.996 U2.12@26.309,15.996
  Top Layer w0.4: 25.601,14.488 28,14.488 28.15,14.638 Rsense1.3 ; U2.12@26.309,15.996 U2.12
NetRsense1_4: Rsense1.4 U2.11 U2.13 | length 4.2
  Top Layer w0.35: U2.11 27.317,15.371 ; U2.13 27.783,16.671
  Top Layer w0.4: 27.317,15.371 28.15,16.204 Rsense1.4 27.783,16.671
NetRsense2_3: Rsense2.3 U1.12 | length 6.7
  Top Layer w0.254: 35.052,60.706 35.473,61.127 36.38,61.127 U1.12
  Top Layer w0.305: 35.052,60.706 35.052,59.998 35.231,59.82 35.345,59.82
  Top Layer w0.5: 35.345,59.82 38.377,59.82 38.591,60.034 38.691,60.034 38.791,60.134 Rsense2.3 Rsense2.3@39.005,60.448
NetRsense2_4: Rsense2.4 U1.11 U1.13 | length 4.8
  Top Layer w0.35: U1.13@36.501,61.852 37.653,61.852
  Top Layer w0.4: U1.11 37.653,60.575 37.946,60.868
  Top Layer w0.5: 37.946,60.868 37.946,61.559 37.653,61.852 38.597,61.852 Rsense2.4@38.615,61.834
NetRt1_2: Rt1.2 U1.3 | length 7.3
  Top Layer w0.35: 27.092,65.125 U1.3
  Top Layer w0.4: 25.85,63.884 27.092,65.125
  Top Layer w0.508: Rt1.2 25.85,63.884
NetRt2_2: Rt2.2 U2.3 | length 7.7
  Top Layer w0.35: 15.528,18.296 17.153,19.921 U2.3
  Top Layer w0.508: Rt2.2 15.528,18.296
NetRuv1_1: Ruv1.1 Ruv2.2 U1.2 | length 11.1
  Top Layer w0.35: 28.802,66.424 29.451,65.775 U1.2
  Top Layer w0.6: Ruv2.2 26.262,66.424 28.802,66.424
  Top Layer w0.635: 26.262,66.424 Ruv1.1
NetRuv3_1: Ruv3.1 Ruv4.2 U2.2 | length 11.5
  Top Layer w0.35: 17.816,21.6 18.845,20.571 U2.2
  Top Layer w0.508: 16.265,21.6 17.816,21.6
  Top Layer w0.6: Ruv4.2 13.278,21.242 13.578,21.542 13.871,21.542 13.929,21.6 16.265,21.6 15.784,22.08 Ruv3.1@15.784,25.07
VIN: Cin1.2 Cin2.2 Cinx1.2 Cinx2.2 J1.N M1.5-6-7-8 M3.5-6-7-8 P3.4 Renable1.2 Renable2.2 Ruv1.2 Ruv3.2 U1.1 U2.1 | length 159.8
  Top Layer w0.051: U2.1@20.109,21.221 U2.1
  Top Layer w0.4: U2.1 20.434,24.401 ; U1.1 30.578,68.712
  Top Layer w0.6: Renable2.2 8.88,16.012 7.62,17.272 7.62,25.908 8.934,27.222 Ruv3.2 ; 15.784,38.572 Ruv3.2 ; 20.434,24.401 17.613,27.222 ; v2(20.864,27.188) 20.83,27.222 17.613,27.222 ; Ruv3.2 17.613,27.222
  Top Layer w0.635: Renable1.2 21.012,61.716 15.594,61.716 ; Ruv1.2 16.136,72.554 15.594,72.012 15.594,61.716 ; Ruv1.2@26.301,72.515 28.299,72.515 ; 30.578,68.712 30.578,70.236 28.299,72.515 ; v3(32.191,72.515) 28.299,72.515 ; J1.N@37.187,38.608 15.748,38.608 15.594,38.762 15.594,61.716
  Top Layer w1.27: J1.N 37.954,39.116 41.968,39.116 ; Cin1.2 Cinx1.2@45.595,40.298 ; Cin1.2@43.21,40.298 43.145,40.233 43.085,40.233 41.968,39.116 ; Cinx1.2@45.675,40.177 47.315,38.537 50.115,38.537 P3.4@50.163,38.489 ; Cinx2.2@45.72,36.38 45.69,36.41 Cin2.2 43.15,36.41 43.115,36.445 43.115,37.149 41.968,38.296 41.968,39.116
  Bottom Layer w0.6: v2(20.864,27.188) 20.91,27.234 26.456,27.234 v3(26.502,27.279)
  Bottom Layer w0.635: v3(32.191,72.515) 32.232,72.555 37.001,72.555 v4(37.041,72.596)
pads on no net: D1.2 D2.2 M1.2 M1.3 M2.2 M2.3 M3.2 M3.3 M4.2 M4.3 P3.1 P3.3 P3.5 P3.6 P3.7 P3.9 P3.MH1 P3.MH2

## Text inside footprints (layer, text, board x,y; h text height)
Cout1: Top Overlay "+" at 35.837,49.318 h1.5
Cout2: Top Overlay "+" at 25.436,6.106 h1.5